# EAGLE board Makita_PSU (EAGLE 9.6.2)
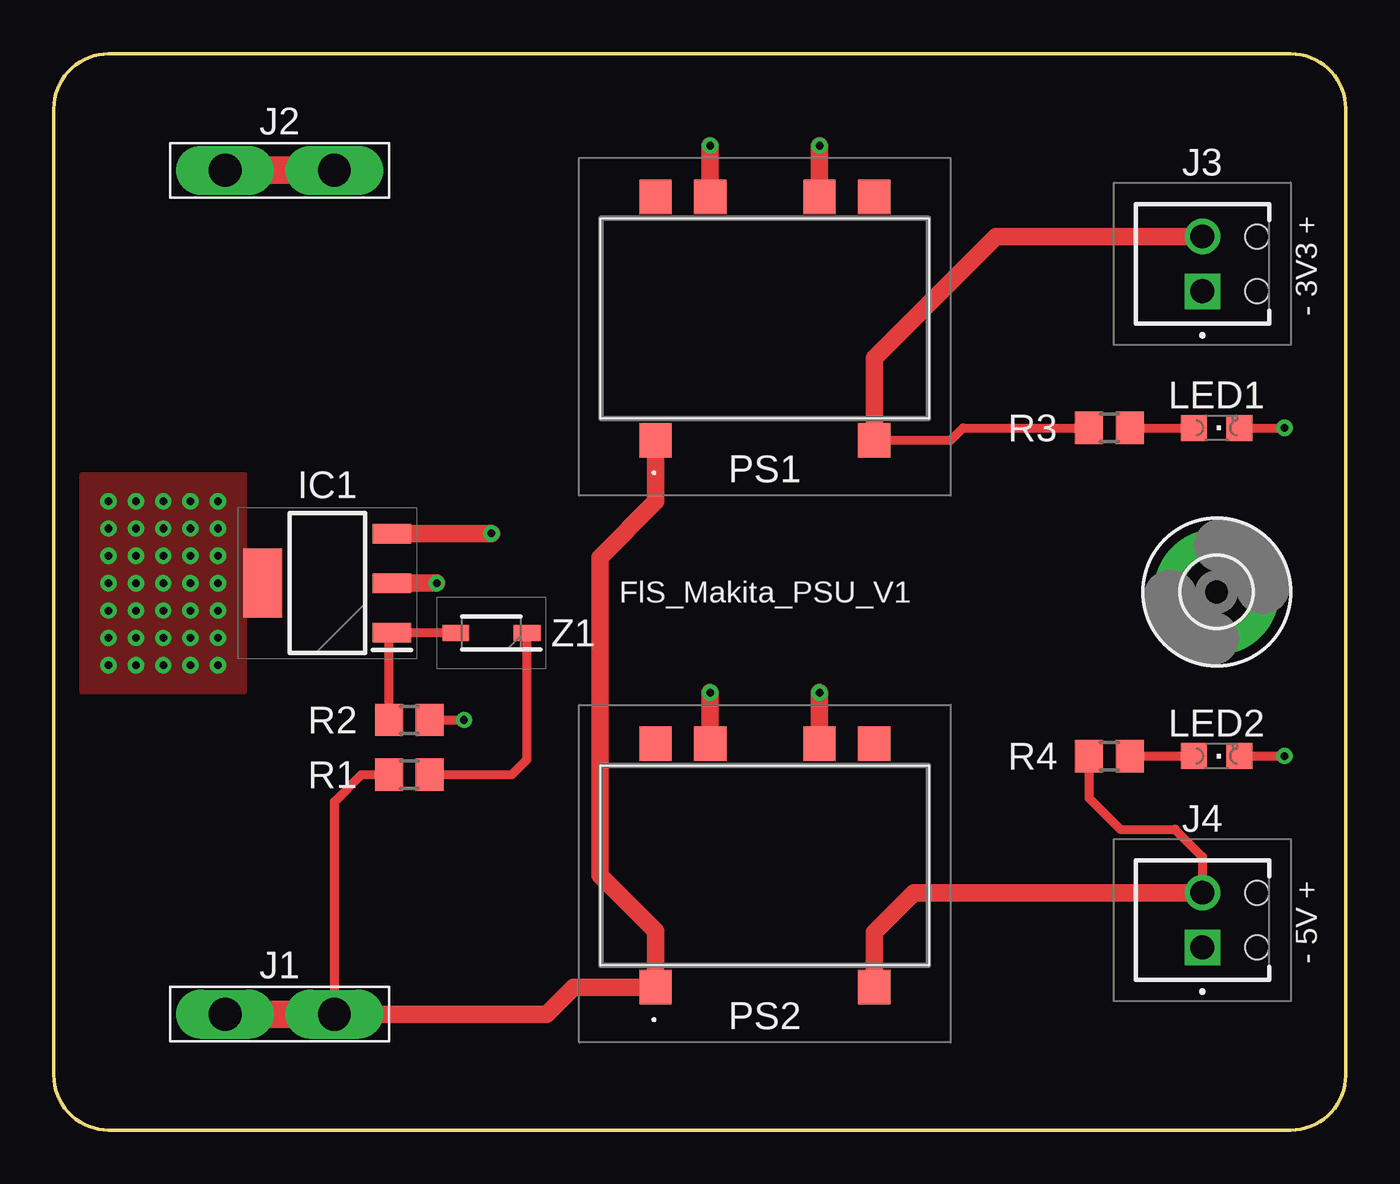
[diagram p0: board, top side]
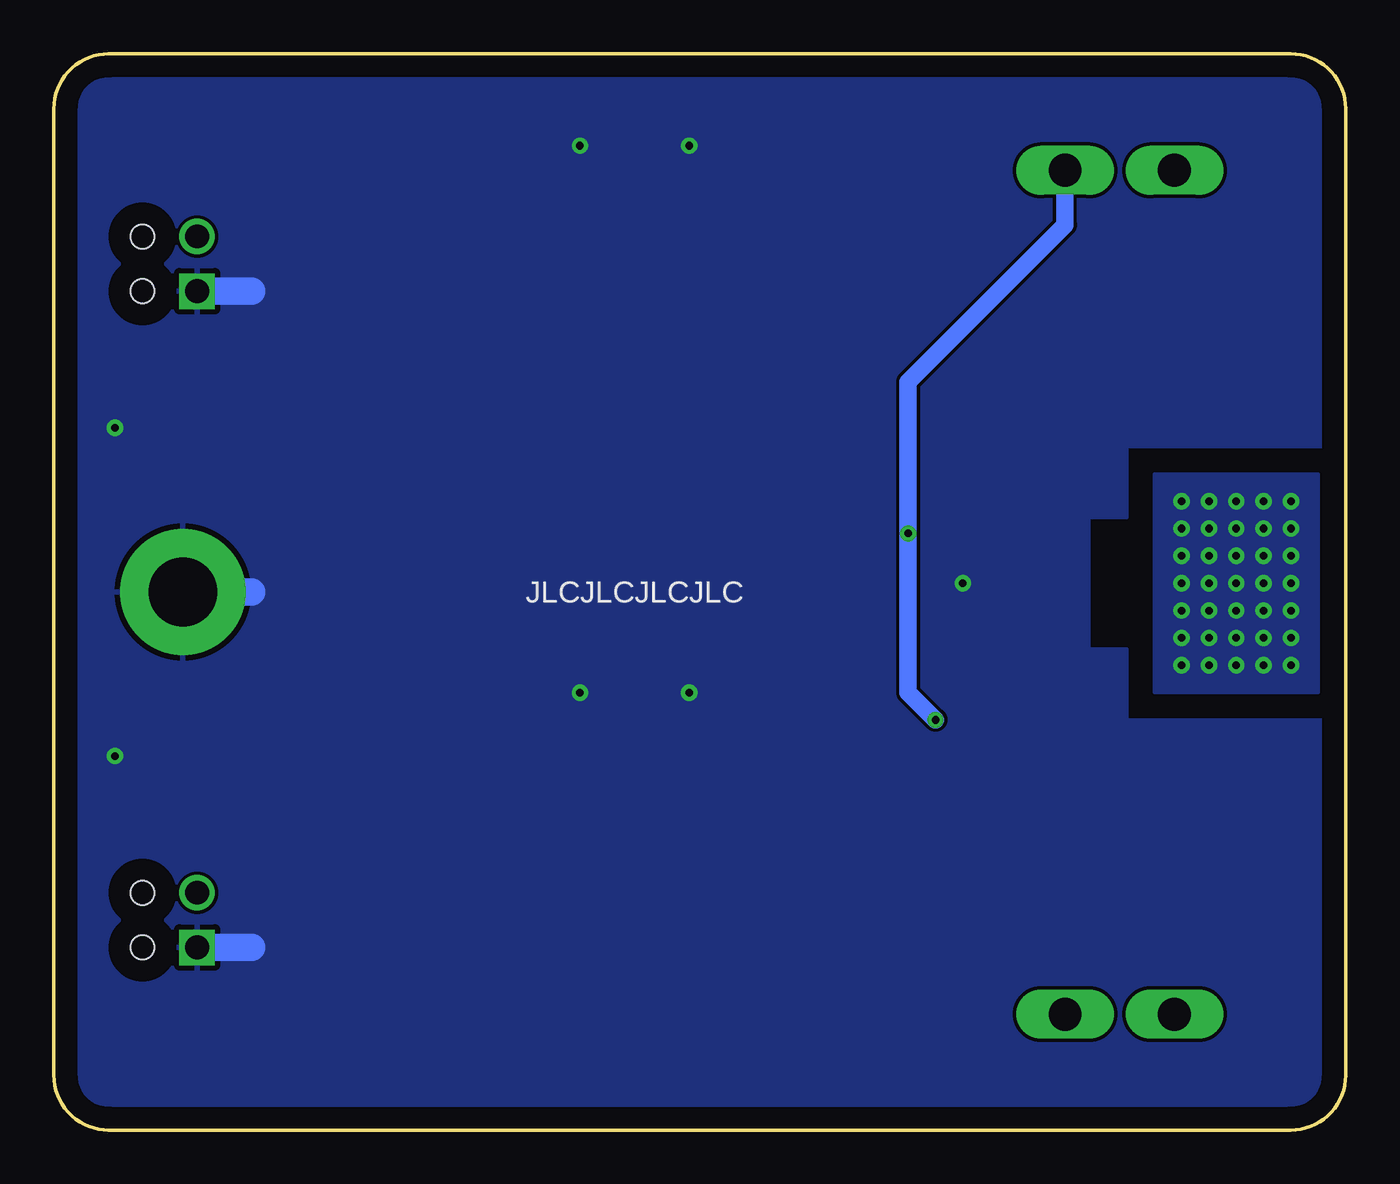
[diagram p1: board, bottom side, seen from below]

Size 59.99 x 49.99 mm. Coordinates in mm from the lower left corner, seen from the top.
Outline: 2.54,0 arc-90 0,2.54 0,47.45 arc-90 2.54,49.99 57.45,49.99 arc-90 59.99,47.45 59.99,2.54 arc-90 57.45,0 2.54,0
Copper layers (1*16): Top 0.035mm / dielectric 1.5mm / Bottom 0.035mm
Design rules "default": minimum track width 6mil, minimum drill 0.35mm, track to track 6mil, track to pad 6mil, pad to pad 6mil, via to via 6mil, smd to smd 6mil, copper to edge 40mil, drill to drill 6mil, minimum pad ring 10mil, minimum via ring 8mil, stop-mask expansion 4mil, vias tented up to drill 0mil, thermal gap 10mil

## Footprints (pad centres in the part's own frame; a part is rotated, then mirrored left to right if it is on the bottom)
3,2-PAD = drill 3.2 pad 5.842: B3,2 0,0
SOT230P700X180-4N = smd 1.8 x 0.9: 1 -3,2.3; 2 -3,0; 3 -3,-2.3 | smd 1.8 x 3.2: 4 3,0
VOGT_3825Z.68 = drill 1.524 long: P$1 -2.54,0; P$2 2.54,0
1725656 = drill 1.1 pad 1.65 square: 1 0,0 | drill 1.1 pad 1.65: 2 2.54,0 | hole 1.1: 0,-2.54; 2.54,-2.54
CHIPLED_0805 = smd 1.2 x 1.2: A 0,-1.05; C 0,1.05
TSR124120SM = smd 1.5 x 1.61: 1 -5.08,-5.655; 5 5.08,-5.655; 6 5.08,5.655; 7 2.54,5.655; 9 -2.54,5.655; 10 -5.08,5.655
R0805 = smd 1.3 x 1.5: 1 -0.95,0; 2 0.95,0
SOD3716X135N = smd 1.25 x 0.75: 1 -1.65,0; 2 1.65,0

## Placement (x,y rotation side)
H1  MOUNT-PAD-ROUND3.2  [3,2-PAD]  54,24.99 0 top
IC1  FZT653TA  [SOT230P700X180-4N]  12.7,25.4 180 top
J1  VOGT_3825Z.68  [VOGT_3825Z.68]  10.49,5.38 0 top
J2  VOGT_3825Z.68  [VOGT_3825Z.68]  10.49,44.58 0 top
J3  1725656  [1725656]  53.34,38.96 90 top
J4  1725656  [1725656]  53.34,8.48 90 top
LED1  [CHIPLED_0805]  54,32.61 270 top
LED2  [CHIPLED_0805]  54,17.37 270 top
PS1  TSR_1-2433SM  [TSR124120SM]  33.02,37.69 0 top
PS2  TSR_1-2450SM  [TSR124120SM]  33.02,12.29 0 top
R1  2.2k  [R0805]  16.51,16.51 180 top
R2  22k  [R0805]  16.51,19.05 180 top
R3  1.8k  [R0805]  49.02,32.61 180 top
R4  12k  [R0805]  49.02,17.37 180 top
Z1  BZT52B15-E3-18  [SOD3716X135N]  20.32,23.09 180 top

## Library data of the parts
H1 = holes
IC1 = FlS; DESCRIPTION: Bipolar Transistors - BJT NPN Medium Power; HEIGHT: 1.8mm; MANUFACTURER_NAME: Diodes Inc.; MANUFACTURER_PART_NUMBER: FZT653TA; MOUSER_PART_NUMBER: 522-FZT653TA; MOUSER_PRICE-STOCK: https://www.mouser.co.uk/ProductDetail/Diodes-Incorporated/FZT653TA?qs=rI7uf1IzohQqmHMCtqURKQ%3D%3D
J1 J2 = FlS
J3 J4 = FlS; DESCRIPTION: PCB terminal block, nominal current: 6 A, rated voltage (III/2): 160 V, nominal cross section: 0.5 mm?, Number of potentials: 2, Number of rows: 1, Number of positions per row: 2, product range: MPT 0,5, pitch: 2.54 mm, connection method: Screw connection with tension sleeve, mounting: Wave soldering, conductor/PCB connection direction: 0 ?, color: green, Pin layout: Linear pinning, Solder pin [P]: 3.5 mm, type of packaging: packed in cardboard; HEIGHT: 8.65mm; MANUFACTURER_NAME: Phoenix Contact; MANUFACTURER_PART_NUMBER: 1725656; MOUSER_PART_NUMBER: 651-1725656; MOUSER_PRICE-STOCK: https://www.mouser.co.uk/ProductDetail/Phoenix-Contact/1725656?qs=Ul7CXFMnlWWQeccayYbRmw%3D%3D
LED1 LED2 = led
PS1 = FlS; DESCRIPTION: 1 Amp POL switching regulator, 3.0 to -36 VDC input, pos.-pos. circuit, SMD package; HEIGHT: 7.6mm; MANUFACTURER_NAME: Traco Power; MANUFACTURER_PART_NUMBER: TSR 1-2433SM; MOUSER_PART_NUMBER: 495-TSR1-2433SM; MOUSER_PRICE-STOCK: https://www.mouser.co.uk/ProductDetail/TRACO-Power/TSR-1-2433SM?qs=7DKAAOw6jrii6flqzVbLkA%3D%3D
PS2 = FlS; DESCRIPTION: 1 Amp POL switching regulator, 3.0 to -36 VDC input, pos.-pos. circuit, SMD package; HEIGHT: 7.6mm; MANUFACTURER_NAME: Traco Power; MANUFACTURER_PART_NUMBER: TSR 1-2450SM; MOUSER_PART_NUMBER: 495-TSR1-2450SM; MOUSER_PRICE-STOCK: https://www.mouser.co.uk/ProductDetail/TRACO-Power/TSR-1-2450SM?qs=7DKAAOw6jrikgapa5Q3iJg%3D%3D
R1-R4 = rcl; SPICEPREFIX: R
Z1 = FlS; DESCRIPTION: Zener Diodes 15 Volt 0.5W 2%; HEIGHT: 1.35mm; MANUFACTURER_NAME: Vishay; MANUFACTURER_PART_NUMBER: BZT52B15-E3-18; MOUSER_PART_NUMBER: 78-BZT52B15-E3-18; MOUSER_PRICE-STOCK: https://www.mouser.co.uk/ProductDetail/Vishay-Semiconductors/BZT52B15-E3-18?qs=KP8Io%2FXyE5SvlbRZ336LSg%3D%3D

## Nets
+3V3: J3.2 PS1.5 R3.2
+5V: J4.2 PS2.5 R4.2
GND: IC1.3 J2.P$1 J2.P$2 R2.1
GND_UVP: H1.B3,2 IC1.2 J3.1 J4.1 LED1.C LED2.C PS1.7 PS1.9 PS2.7 PS2.9
N$1: IC1.1 R2.2 Z1.2
N$2: R1.1 Z1.1
N$3: LED1.A R3.1
N$5: LED2.A R4.1
THP: IC1.4
VCC: J1.P$1 J1.P$2 PS1.1 PS2.1 R1.2

## Tracks (layer width: path | path; a pad name or v marks a point on that pad's centre or on a via)
+3V3
  Top 0.406: PS1.5 41.66,32.04 42.23,32.61 R3.2
  Top 0.813: PS1.5 38.1,35.85 43.76,41.5 J3.2
+5V
  Top 0.406: R4.2 48.07,15.43 49.53,13.97 52.07,13.97 53.34,12.7 J4.2
  Top 0.813: PS2.5 38.1,9.18 39.95,11.02 J4.2
GND  (via drill 0.35)
  Top 0.406: R2.1 v19.05,19.05
  Top 0.813: IC1.3 v20.31,27.7 v20.32,27.71
  Top 1.27: J2.P$1 J2.P$2
  Bottom 0.813: v19.05,19.05 20.32,20.32 v20.32,27.71 20.32,34.75 13.03,42.04 J2.P$2
GND_UVP  (via drill 0.35)
  Top 0.406: LED1.C v57.15,32.61 | LED2.C v57.15,17.37
  Top 0.813: PS2.9 v30.48,20.32 | PS2.7 v35.56,20.32 | PS1.9 v30.48,45.72 | PS1.7 v35.56,45.72 | IC1.2 v17.78,25.4
  Bottom 1.27: J3.1 50.8,38.96 | H1.B3,2 50.8,24.99 | J4.1 50.8,8.48
  pour Bottom: 0,0 60.96,0 60.96,50.8 0,50.8 0,31.75 10.16,31.75 10.16,28.45 11.94,28.45 11.94,22.35 10.16,22.35 10.16,19.05 0,19.05
N$1
  Top 0.406: Z1.2 15.71,23.09 IC1.1 15.56,22.96 R2.2
N$2
  Top 0.406: R1.1 21.27,16.51 21.97,17.21 Z1.1
N$3
  Top 0.406: R3.1 LED1.A
N$5
  Top 0.406: R4.1 LED2.A
THP  (via drill 0.35)
  other vias: 7.62,25.4 6.35,25.4 5.08,25.4 3.81,25.4 2.54,25.4 2.54,26.67 2.54,27.94 2.54,29.21 3.81,29.21 5.08,29.21 6.35,29.21 7.62,29.21 7.62,27.94 6.35,27.94 5.08,27.94 3.81,27.94 3.81,26.67 5.08,26.67 6.35,26.67 7.62,26.67 7.62,24.13 6.35,24.13 5.08,24.13 3.81,24.13 2.54,24.13 2.54,22.86 3.81,22.86 5.08,22.86 6.35,22.86 7.62,22.86 7.62,21.59 6.35,21.59 5.08,21.59 3.81,21.59 2.54,21.59
  pour Top (no thermals): 8.89,30.48 8.89,20.32 1.27,20.32 1.27,30.48
  pour Bottom: 1.27,30.48 8.89,30.48 8.89,20.32 1.27,20.32
VCC
  Top 0.406: J1.P$2 13.03,15.25 14.29,16.51 R1.2
  Top 0.813: J1.P$2 22.88,5.38 24.13,6.64 PS2.1 27.94,9.25 25.36,11.83 25.36,26.61 27.94,29.18 PS1.1
  Top 1.27: J1.P$1 J1.P$2

## Text on the board
tNames: - 3V3 + | FlS_Makita_PSU_V1 | - 5V +
bNames: JLCJLCJLCJLC